# Altium PCB PCB1.PcbDoc (part 2 of 2)
Units mm, origin at the board's own origin, x right, y up, seen from the top; angles counter-clockwise.
Board outline 71.37 x 73.91 mm, 2 copper layers (Top Layer, Bottom Layer); 19 components, 50 nets, 188 pads, 78 vias.
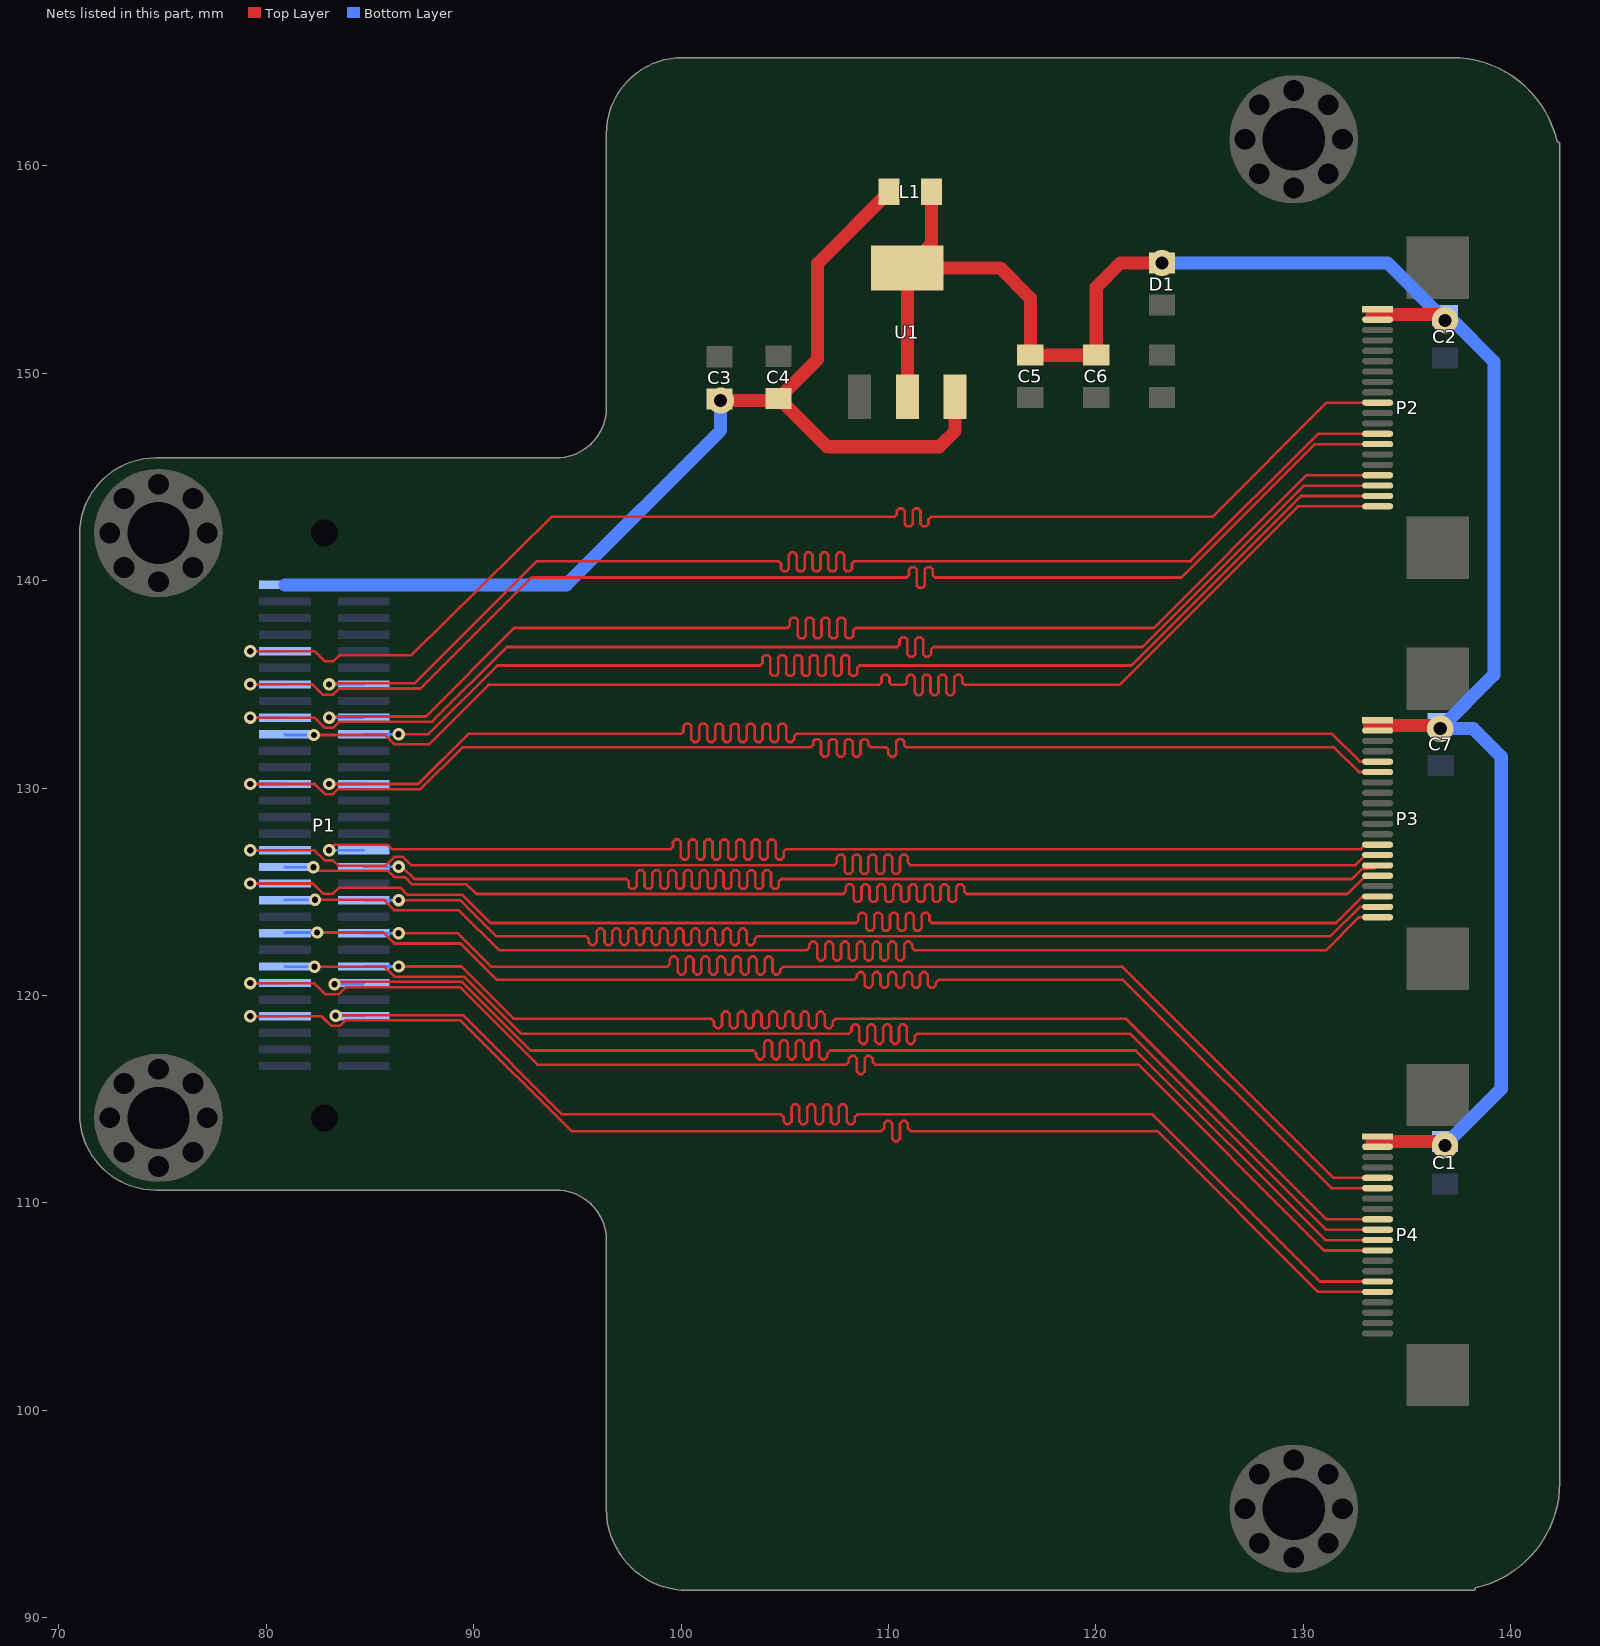
[diagram p2: the nets of this part, all layers, seen from the top]

## Via types
v1: diameter 0.6, hole 0.3, Top Layer to Bottom Layer, 70 vias
v2: diameter 1.27, hole 0.635, Top Layer to Bottom Layer, 8 vias

## Nets (pads, with @x,y where several pads share a name; then routed paths per layer and width w, separated by ;. In a path a pad name is that pad's centre, name@x,y a point inside that pad or via, vN(x,y) a via of type N, cw(c..) or ccw(c..) an arc to the next point about the centre after c; other vN are vias at no path point) (continued)
U14: P1.43 P4.5 | length 63.8
  Top Layer w0.127: v1(86.377,123) 89.242,123 90.856,121.387 95.987,121.387 99.32,121.387 99.454,121.52 99.454,121.753 99.587,121.887 99.701,121.887 99.835,121.753 99.835,121.387 99.835,121.139 99.968,121.006 100.082,121.006 100.216,121.139 100.216,121.387 100.216,121.753 100.349,121.887 100.463,121.887 100.597,121.753 100.597,121.387 100.597,121.139 100.73,121.006 100.844,121.006 100.978,121.139 100.978,121.387 100.978,121.753 101.111,121.887 101.225,121.887 101.359,121.753 101.359,121.387 101.359,121.139 101.492,121.006 101.606,121.006 101.74,121.139 101.74,121.387 101.74,121.753 101.873,121.887 101.987,121.887 102.121,121.753 102.121,121.387 102.121,121.139 102.254,121.006 102.368,121.006 102.502,121.139 102.502,121.387 102.502,121.753 102.635,121.887 102.749,121.887 102.883,121.753 102.883,121.387 102.883,121.139 103.016,121.006 103.13,121.006 103.264,121.139 103.264,121.387 103.264,121.753 103.397,121.887 103.511,121.887 103.645,121.753 103.645,121.387 103.645,121.139 103.778,121.006 103.892,121.006 104.026,121.139 104.026,121.387 104.026,121.753 104.159,121.887 104.273,121.887 104.407,121.753 104.407,121.387 104.407,121.139 104.54,121.006 104.654,121.006 104.788,121.139 104.788,121.253 104.921,121.387 104.978,121.387 121.285,121.387 131.463,111.208 P4.5@133.586,111.208
  Bottom Layer w0.127: P1.43@84.7,123 v1(86.377,123)
U15: P1.44 P4.6 | length 63.7
  Top Layer w0.127: v1(82.448,123.038) 85.646,123.038 86.174,122.509 89.374,122.509 91.132,120.752 108.28,120.752 108.337,120.752 108.471,120.885 108.471,120.999 108.604,121.133 108.718,121.133 108.852,120.999 108.852,120.752 108.852,120.504 108.985,120.371 109.099,120.371 109.233,120.504 109.233,120.752 109.233,120.999 109.366,121.133 109.48,121.133 109.614,120.999 109.614,120.752 109.614,120.504 109.747,120.371 109.861,120.371 109.995,120.504 109.995,120.752 109.995,120.999 110.128,121.133 110.242,121.133 110.376,120.999 110.376,120.752 110.376,120.504 110.509,120.371 110.623,120.371 110.757,120.504 110.757,120.752 110.757,120.999 110.89,121.133 111.004,121.133 111.138,120.999 111.138,120.752 111.138,120.504 111.271,120.371 111.385,120.371 111.519,120.504 111.519,120.752 111.519,120.999 111.652,121.133 111.766,121.133 111.9,120.999 111.9,120.752 111.9,120.504 112.033,120.371 112.147,120.371 112.281,120.504 112.281,120.618 112.414,120.752 115.646,120.752 121.31,120.752 131.354,110.708 P4.6@133.586,110.708
  Bottom Layer w0.127: P1.44@80.9,123 80.938,123.038 v1(82.448,123.038)
U17: P1.38 P3.18 | length 64.1
  Top Layer w0.127: v1(79.223,125.4) 82.253,125.4 82.743,124.909 83.226,124.909 83.518,125.201 86.469,125.201 86.817,124.854 89.449,124.854 90.809,123.495 108.356,123.495 108.433,123.495 108.547,123.609 108.547,123.871 108.661,123.986 108.814,123.986 108.928,123.871 108.928,123.495 108.928,123.237 109.042,123.123 109.195,123.123 109.309,123.237 109.309,123.495 109.309,123.871 109.423,123.986 109.576,123.986 109.69,123.871 109.69,123.495 109.69,123.237 109.804,123.123 109.957,123.123 110.071,123.237 110.071,123.495 110.071,123.871 110.185,123.986 110.338,123.986 110.452,123.871 110.452,123.495 110.452,123.237 110.566,123.123 110.719,123.123 110.833,123.237 110.833,123.495 110.833,123.871 110.947,123.986 111.1,123.986 111.214,123.871 111.214,123.495 111.214,123.237 111.328,123.123 111.481,123.123 111.595,123.237 111.595,123.495 111.595,123.871 111.709,123.986 111.862,123.986 111.976,123.871 111.976,123.609 112.09,123.495 117.627,123.495 131.584,123.495 132.863,124.774 P3.18@133.586,124.774
  Bottom Layer w0.127: v1(79.223,125.4) P1.38@80.9,125.4
U18: P1.33 P3.13 | length 64
  Top Layer w0.127: v1(83.023,127) 83.297,127.274 85.85,127.274 86.069,127.055 95.453,127.055 99.492,127.055 99.606,127.17 99.606,127.406 99.72,127.52 99.873,127.52 99.987,127.406 99.987,127.055 99.987,126.67 100.101,126.555 100.254,126.555 100.368,126.67 100.368,127.055 100.368,127.406 100.482,127.52 100.635,127.52 100.749,127.406 100.749,127.055 100.749,126.67 100.863,126.555 101.016,126.555 101.13,126.67 101.13,127.055 101.13,127.406 101.244,127.52 101.397,127.52 101.511,127.406 101.511,127.055 101.511,126.67 101.625,126.555 101.778,126.555 101.892,126.67 101.892,127.055 101.892,127.406 102.006,127.52 102.159,127.52 102.273,127.406 102.273,127.055 102.273,126.67 102.387,126.555 102.54,126.555 102.654,126.67 102.654,127.055 102.654,127.406 102.768,127.52 102.921,127.52 103.035,127.406 103.035,127.055 103.035,126.67 103.149,126.555 103.302,126.555 103.416,126.67 103.416,127.055 103.416,127.406 103.53,127.52 103.683,127.52 103.797,127.406 103.797,127.055 103.797,126.67 103.911,126.555 104.064,126.555 104.178,126.67 104.178,127.055 104.178,127.406 104.292,127.52 104.445,127.52 104.559,127.406 104.559,127.055 104.559,126.67 104.673,126.555 104.826,126.555 104.94,126.67 104.94,126.941 105.054,127.055 105.131,127.055 132.785,127.055 133.004,127.274 P3.13@133.586,127.274
  Bottom Layer w0.127: v1(83.023,127) P1.33@84.7,127
U19: P1.34 P3.14 | length 63.9
  Top Layer w0.127: v1(79.223,127) 82.329,127 82.82,126.509 83.226,126.509 83.472,126.263 85.747,126.263 86.174,126.69 86.58,126.69 86.982,126.289 107.315,126.289 107.391,126.289 107.505,126.403 107.505,126.674 107.62,126.789 107.772,126.789 107.886,126.674 107.886,126.289 107.886,125.984 108.001,125.87 108.153,125.87 108.267,125.984 108.267,126.289 108.267,126.674 108.382,126.789 108.534,126.789 108.648,126.674 108.648,126.289 108.648,125.984 108.763,125.87 108.915,125.87 109.029,125.984 109.029,126.289 109.029,126.674 109.144,126.789 109.296,126.789 109.41,126.674 109.41,126.289 109.41,125.984 109.525,125.87 109.677,125.87 109.791,125.984 109.791,126.289 109.791,126.674 109.906,126.789 110.058,126.789 110.172,126.674 110.172,126.289 110.172,125.984 110.287,125.87 110.439,125.87 110.553,125.984 110.553,126.289 110.553,126.674 110.668,126.789 110.82,126.789 110.934,126.674 110.934,126.403 111.049,126.289 115.545,126.289 132.519,126.289 133.004,126.774 P3.14@133.586,126.774
  Bottom Layer w0.127: v1(79.223,127) P1.34@80.9,127
U20: P1.10 P2.10 | length 64.1
  Top Layer w0.127: v1(79.223,136.6) 82.329,136.6 82.82,136.109 83.226,136.109 83.518,136.401 86.973,136.401 93.755,143.078 110.211,143.078 110.287,143.078 110.401,143.192 110.401,143.368 110.515,143.482 110.668,143.482 110.782,143.368 110.782,143.078 110.782,142.738 110.896,142.624 111.049,142.624 111.163,142.738 111.163,143.078 111.163,143.368 111.277,143.482 111.43,143.482 111.544,143.368 111.544,143.078 111.544,142.738 111.658,142.624 111.811,142.624 111.925,142.738 111.925,142.964 112.039,143.078 118.542,143.078 125.614,143.078 131.122,148.586 P2.10@133.586,148.586
  Bottom Layer w0.127: v1(79.223,136.6) P1.10@80.9,136.6
V12: P1.53 P4.15 | length 64.1
  Top Layer w0.127: v1(83.337,119.024) 83.368,119.055 89.471,119.055 94.252,114.275 101.219,114.275 104.807,114.275 104.94,114.141 104.94,113.922 105.073,113.788 105.188,113.788 105.321,113.922 105.321,114.275 105.321,114.627 105.454,114.761 105.569,114.761 105.702,114.627 105.702,114.275 105.702,113.922 105.835,113.788 105.95,113.788 106.083,113.922 106.083,114.275 106.083,114.627 106.216,114.761 106.331,114.761 106.464,114.627 106.464,114.275 106.464,113.922 106.597,113.788 106.712,113.788 106.845,113.922 106.845,114.275 106.845,114.627 106.978,114.761 107.093,114.761 107.226,114.627 107.226,114.275 107.226,113.922 107.359,113.788 107.474,113.788 107.607,113.922 107.607,114.275 107.607,114.627 107.74,114.761 107.855,114.761 107.988,114.627 107.988,114.275 107.988,113.922 108.121,113.788 108.236,113.788 108.369,113.922 108.369,114.141 108.502,114.275 108.56,114.275 122.733,114.275 130.799,106.208 P4.15@133.586,106.208
  Bottom Layer w0.127: v1(83.337,119.024) 84.676,119.024 P1.53@84.7,119
V15: P1.35 P3.15 | length 63.7
  Top Layer w0.127: v1(86.377,126.2) 86.548,126.2 87.132,125.616 95.936,125.616 97.358,125.616 97.472,125.502 97.472,125.26 97.587,125.146 97.739,125.146 97.853,125.26 97.853,125.616 97.853,125.921 97.968,126.035 98.12,126.035 98.234,125.921 98.234,125.616 98.234,125.26 98.349,125.146 98.501,125.146 98.615,125.26 98.615,125.616 98.615,125.921 98.73,126.035 98.882,126.035 98.996,125.921 98.996,125.616 98.996,125.26 99.111,125.146 99.263,125.146 99.377,125.26 99.377,125.616 99.377,125.921 99.492,126.035 99.644,126.035 99.758,125.921 99.758,125.616 99.758,125.26 99.873,125.146 100.025,125.146 100.139,125.26 100.139,125.616 100.139,125.921 100.254,126.035 100.406,126.035 100.52,125.921 100.52,125.616 100.52,125.26 100.635,125.146 100.787,125.146 100.901,125.26 100.901,125.616 100.901,125.921 101.016,126.035 101.168,126.035 101.282,125.921 101.282,125.616 101.282,125.26 101.397,125.146 101.549,125.146 101.663,125.26 101.663,125.616 101.663,125.921 101.778,126.035 101.93,126.035 102.044,125.921 102.044,125.616 102.044,125.26 102.159,125.146 102.311,125.146 102.425,125.26 102.425,125.616 102.425,125.921 102.54,126.035 102.692,126.035 102.806,125.921 102.806,125.616 102.806,125.26 102.921,125.146 103.073,125.146 103.188,125.26 103.188,125.616 103.188,125.921 103.302,126.035 103.454,126.035 103.569,125.921 103.569,125.616 103.569,125.26 103.683,125.146 103.835,125.146 103.95,125.26 103.95,125.616 103.95,125.921 104.064,126.035 104.216,126.035 104.331,125.921 104.331,125.616 104.331,125.26 104.445,125.146 104.597,125.146 104.712,125.26 104.712,125.502 104.826,125.616 104.902,125.616 132.346,125.616 132.845,126.115 133.426,126.115 P3.15@133.586,126.274
  Bottom Layer w0.127: P1.35@84.7,126.2 v1(86.377,126.2)
V16: P1.39 P3.19 | length 63.9
  Top Layer w0.127: v1(86.377,124.6) 89.344,124.6 91.084,122.86 93.218,122.86 95.409,122.86 95.542,122.726 95.542,122.561 95.675,122.428 95.79,122.428 95.923,122.561 95.923,122.86 95.923,123.107 96.056,123.241 96.171,123.241 96.304,123.107 96.304,122.86 96.304,122.561 96.437,122.428 96.552,122.428 96.685,122.561 96.685,122.86 96.685,123.107 96.818,123.241 96.933,123.241 97.066,123.107 97.066,122.86 97.066,122.561 97.199,122.428 97.314,122.428 97.447,122.561 97.447,122.86 97.447,123.107 97.58,123.241 97.695,123.241 97.828,123.107 97.828,122.86 97.828,122.561 97.961,122.428 98.076,122.428 98.209,122.561 98.209,122.86 98.209,123.107 98.342,123.241 98.457,123.241 98.59,123.107 98.59,122.86 98.59,122.561 98.723,122.428 98.838,122.428 98.971,122.561 98.971,122.86 98.971,123.107 99.104,123.241 99.219,123.241 99.352,123.107 99.352,122.86 99.352,122.561 99.485,122.428 99.6,122.428 99.733,122.561 99.733,122.86 99.733,123.107 99.866,123.241 99.981,123.241 100.114,123.107 100.114,122.86 100.114,122.561 100.247,122.428 100.362,122.428 100.495,122.561 100.495,122.86 100.495,123.107 100.628,123.241 100.743,123.241 100.876,123.107 100.876,122.86 100.876,122.561 101.009,122.428 101.124,122.428 101.257,122.561 101.257,122.86 101.257,123.107 101.39,123.241 101.505,123.241 101.638,123.107 101.638,122.86 101.638,122.561 101.771,122.428 101.886,122.428 102.019,122.561 102.019,122.86 102.019,123.107 102.152,123.241 102.267,123.241 102.4,123.107 102.4,122.86 102.4,122.561 102.533,122.428 102.648,122.428 102.781,122.561 102.781,122.86 102.781,123.107 102.914,123.241 103.029,123.241 103.162,123.107 103.162,122.86 103.162,122.561 103.295,122.428 103.41,122.428 103.543,122.561 103.543,122.726 103.676,122.86 103.734,122.86 131.308,122.86 132.722,124.274 P3.19@133.586,124.274
  Bottom Layer w0.127: P1.39@84.7,124.6 v1(86.377,124.6)
V17: P1.25 P3.5 | length 64.1
  Top Layer w0.127: v1(83.023,130.2) 87.325,130.2 89.738,132.613 97.561,132.613 100,132.613 100.114,132.728 100.114,132.995 100.228,133.109 100.381,133.109 100.495,132.995 100.495,132.613 100.495,132.341 100.609,132.227 100.762,132.227 100.876,132.341 100.876,132.613 100.876,132.995 100.99,133.109 101.143,133.109 101.257,132.995 101.257,132.613 101.257,132.341 101.371,132.227 101.524,132.227 101.638,132.341 101.638,132.613 101.638,132.995 101.752,133.109 101.905,133.109 102.019,132.995 102.019,132.613 102.019,132.341 102.133,132.227 102.286,132.227 102.4,132.341 102.4,132.613 102.4,132.995 102.514,133.109 102.667,133.109 102.781,132.995 102.781,132.613 102.781,132.341 102.895,132.227 103.048,132.227 103.162,132.341 103.162,132.613 103.162,132.995 103.276,133.109 103.429,133.109 103.543,132.995 103.543,132.613 103.543,132.341 103.657,132.227 103.81,132.227 103.924,132.341 103.924,132.613 103.924,132.995 104.038,133.109 104.191,133.109 104.305,132.995 104.305,132.613 104.305,132.341 104.419,132.227 104.572,132.227 104.686,132.341 104.686,132.613 104.686,132.995 104.8,133.109 104.953,133.109 105.067,132.995 105.067,132.613 105.067,132.341 105.181,132.227 105.334,132.227 105.448,132.341 105.448,132.499 105.562,132.613 105.639,132.613 131.394,132.613 132.733,131.274 P3.5@133.586,131.274
  Bottom Layer w0.127: v1(83.023,130.2) P1.25@84.7,130.2
V18: P1.26 P3.6 | length 63.7
  Top Layer w0.127: v1(79.223,130.2) 82.329,130.2 82.82,129.709 83.226,129.709 83.463,129.946 87.43,129.946 89.453,131.969 106.172,131.969 106.248,131.969 106.362,132.083 106.362,132.245 106.477,132.359 106.629,132.359 106.743,132.245 106.743,131.969 106.743,131.635 106.858,131.521 107.01,131.521 107.124,131.635 107.124,131.969 107.124,132.245 107.239,132.359 107.391,132.359 107.505,132.245 107.505,131.969 107.505,131.635 107.62,131.521 107.772,131.521 107.886,131.635 107.886,131.969 107.886,132.245 108.001,132.359 108.153,132.359 108.267,132.245 108.267,131.969 108.267,131.635 108.382,131.521 108.534,131.521 108.648,131.635 108.648,131.969 108.648,132.245 108.763,132.359 108.915,132.359 109.029,132.245 109.029,132.083 109.144,131.969 109.41,131.969 109.423,131.969 109.614,131.969 109.88,131.969 109.995,131.854 109.995,131.635 110.109,131.521 110.261,131.521 110.376,131.635 110.376,131.969 110.376,132.245 110.49,132.359 110.642,132.359 110.757,132.245 110.757,132.083 110.871,131.969 112.674,131.969 131.48,131.969 132.675,130.774 P3.6@133.586,130.774
  Bottom Layer w0.127: v1(79.223,130.2) P1.26@80.9,130.2
V20: P1.13 P2.13 | length 64.1
  Top Layer w0.127: v1(83.023,135) 83.079,135.055 87.151,135.055 93.04,140.945 100.813,140.945 104.699,140.945 104.813,140.83 104.813,140.571 104.927,140.457 105.08,140.457 105.194,140.571 105.194,140.945 105.194,141.25 105.308,141.364 105.461,141.364 105.575,141.25 105.575,140.945 105.575,140.571 105.689,140.457 105.842,140.457 105.956,140.571 105.956,140.945 105.956,141.25 106.07,141.364 106.223,141.364 106.337,141.25 106.337,140.945 106.337,140.571 106.451,140.457 106.604,140.457 106.718,140.571 106.718,140.945 106.718,141.25 106.832,141.364 106.985,141.364 107.099,141.25 107.099,140.945 107.099,140.571 107.213,140.457 107.366,140.457 107.48,140.571 107.48,140.945 107.48,141.25 107.594,141.364 107.747,141.364 107.861,141.25 107.861,140.945 107.861,140.571 107.975,140.457 108.128,140.457 108.242,140.571 108.242,140.83 108.356,140.945 108.433,140.945 124.558,140.945 130.699,147.086 P2.13@133.586,147.086
  Bottom Layer w0.127: v1(83.023,135) P1.13@84.7,135
VCC_3V3: C1.2 C2.2 C5.2 C6.2 C7.2 D1.1 L1.2 P2.1 P2.2 P3.1 P3.2 P4.1 P4.2 U1.2 U1.4 | length 100.5
  Top Layer w0.635: U1.2@110.908,148.881 U1.4@110.908,155.081 ; L1.2@112.065,158.75 112.065,156.237 U1.4@110.908,155.081 ; v2(123.19,155.321) 121.183,155.321 120.015,154.153 C6.2@120.015,150.876 C5.2@116.84,150.876 116.84,153.619 115.379,155.081 U1.4@110.908,155.081 ; 133.198,133.02 136.449,133.02 v2(136.601,132.867) ; 133.325,112.954 136.652,112.954 v2(136.83,112.776) ; 133.325,152.806 133.35,152.832 136.55,152.832 v2(136.83,152.552)
  Bottom Layer w0.635: v2(123.19,155.321) 134.061,155.321 v2(136.83,152.552) 137.211,152.552 139.192,150.571 139.192,135.458 v2(136.601,132.867) 138.201,132.867 139.548,131.521 139.548,115.494 v2(136.83,112.776)
VCC_5V: C3.2 C4.2 L1.1 P1.1 P1.2 U1.3 | length 52
  Top Layer w0.635: v2(101.905,148.692) 104.597,148.692 C4.2@104.699,148.793 ; L1.1@110.033,158.75 106.578,155.296 106.578,150.673 C4.2@104.699,148.793 ; U1.3@113.208,148.881 113.208,147.219 112.446,146.456 107.036,146.456 C4.2@104.699,148.793
  Bottom Layer w0.635: P1.2@80.9,139.8 P1.1@84.7,139.8 94.461,139.8 101.905,147.244 v2(101.905,148.692)
W13: P1.54 P4.16 | length 64.1
  Top Layer w0.127: v1(79.223,119) 82.668,119 83.134,118.534 83.541,118.534 83.808,118.801 89.366,118.801 94.706,113.462 109.601,113.462 109.658,113.462 109.791,113.595 109.791,113.828 109.925,113.962 110.039,113.962 110.172,113.828 110.172,113.462 110.172,113.095 110.306,112.962 110.42,112.962 110.553,113.095 110.553,113.462 110.553,113.828 110.687,113.962 110.801,113.962 110.934,113.828 110.934,113.595 111.068,113.462 120.04,113.462 122.961,113.462 130.715,105.708 P4.16@133.586,105.708
  Bottom Layer w0.127: v1(79.223,119) P1.54@80.9,119
W14: P1.49 P4.11 | length 63.7
  Top Layer w0.127: v1(83.287,120.548) 83.394,120.655 89.432,120.655 92.739,117.348 96.647,117.348 103.486,117.348 103.619,117.215 103.619,117.05 103.753,116.916 103.867,116.916 104,117.05 104,117.348 104,117.715 104.134,117.848 104.248,117.848 104.381,117.715 104.381,117.348 104.381,117.05 104.515,116.916 104.629,116.916 104.762,117.05 104.762,117.348 104.762,117.715 104.896,117.848 105.01,117.848 105.143,117.715 105.143,117.348 105.143,117.05 105.277,116.916 105.391,116.916 105.524,117.05 105.524,117.348 105.524,117.715 105.658,117.848 105.772,117.848 105.905,117.715 105.905,117.348 105.905,117.05 106.039,116.916 106.153,116.916 106.286,117.05 106.286,117.348 106.286,117.715 106.42,117.848 106.534,117.848 106.667,117.715 106.667,117.348 106.667,117.05 106.801,116.916 106.915,116.916 107.048,117.05 107.048,117.215 107.182,117.348 107.239,117.348 121.92,117.348 131.06,108.208 P4.11@133.586,108.208
  Bottom Layer w0.127: v1(83.287,120.548) 84.648,120.548 P1.49@84.7,120.6
W15: P1.36 P3.16 | length 64.1
  Top Layer w0.127: v1(82.271,126.187) 82.448,126.009 85.874,126.009 86.174,125.709 86.68,125.709 87.027,125.362 89.66,125.362 90.13,124.892 107.747,124.892 107.823,124.892 107.937,125.006 107.937,125.242 108.052,125.357 108.204,125.357 108.318,125.242 108.318,124.892 108.318,124.631 108.433,124.516 108.585,124.516 108.699,124.631 108.699,124.892 108.699,125.242 108.814,125.357 108.966,125.357 109.08,125.242 109.08,124.892 109.08,124.631 109.195,124.516 109.347,124.516 109.461,124.631 109.461,124.892 109.461,125.242 109.576,125.357 109.728,125.357 109.842,125.242 109.842,124.892 109.842,124.631 109.957,124.516 110.109,124.516 110.223,124.631 110.223,124.892 110.223,125.242 110.338,125.357 110.49,125.357 110.604,125.242 110.604,124.892 110.604,124.631 110.719,124.516 110.871,124.516 110.985,124.631 110.985,124.892 110.985,125.242 111.1,125.357 111.252,125.357 111.366,125.242 111.366,124.892 111.366,124.631 111.481,124.516 111.633,124.516 111.747,124.631 111.747,124.892 111.747,125.242 111.862,125.357 112.014,125.357 112.128,125.242 112.128,124.892 112.128,124.631 112.243,124.516 112.395,124.516 112.509,124.631 112.509,124.892 112.509,125.242 112.624,125.357 112.776,125.357 112.89,125.242 112.89,124.892 112.89,124.631 113.005,124.516 113.157,124.516 113.271,124.631 113.271,124.892 113.271,125.242 113.386,125.357 113.538,125.357 113.652,125.242 113.652,125.006 113.767,124.892 119.583,124.892 132.122,124.892 133.004,125.774 P3.16@133.586,125.774
  Bottom Layer w0.127: P1.36@80.9,126.2 80.913,126.187 v1(82.271,126.187)
W16: P1.40 P3.20 | length 64.1
  Top Layer w0.127: v1(82.347,124.612) 85.671,124.612 86.174,124.109 89.301,124.109 91.237,122.174 105.994,122.174 106.051,122.174 106.185,122.307 106.185,122.47 106.318,122.603 106.432,122.603 106.566,122.47 106.566,122.174 106.566,121.81 106.699,121.677 106.813,121.677 106.947,121.81 106.947,122.174 106.947,122.47 107.08,122.603 107.194,122.603 107.328,122.47 107.328,122.174 107.328,121.81 107.461,121.677 107.575,121.677 107.709,121.81 107.709,122.174 107.709,122.47 107.842,122.603 107.956,122.603 108.09,122.47 108.09,122.174 108.09,121.81 108.223,121.677 108.337,121.677 108.471,121.81 108.471,122.174 108.471,122.47 108.604,122.603 108.718,122.603 108.852,122.47 108.852,122.174 108.852,121.81 108.985,121.677 109.099,121.677 109.233,121.81 109.233,122.174 109.233,122.47 109.366,122.603 109.48,122.603 109.614,122.47 109.614,122.174 109.614,121.81 109.747,121.677 109.861,121.677 109.995,121.81 109.995,122.174 109.995,122.47 110.128,122.603 110.242,122.603 110.376,122.47 110.376,122.174 110.376,121.81 110.509,121.677 110.623,121.677 110.757,121.81 110.757,122.174 110.757,122.47 110.89,122.603 111.004,122.603 111.138,122.47 111.138,122.307 111.271,122.174 112.268,122.174 131.089,122.174 132.69,123.774 P3.20@133.586,123.774
  Bottom Layer w0.127: P1.40@80.9,124.6 80.912,124.612 v1(82.347,124.612)
W18: P1.17 P2.17 | length 63.9
  Top Layer w0.127: v1(83.023,133.4) 83.079,133.455 87.688,133.455 91.952,137.719 100.813,137.719 105.131,137.719 105.245,137.833 105.245,138.104 105.359,138.219 105.512,138.219 105.626,138.104 105.626,137.719 105.626,137.333 105.74,137.219 105.893,137.219 106.007,137.333 106.007,137.719 106.007,138.104 106.121,138.219 106.274,138.219 106.388,138.104 106.388,137.719 106.388,137.333 106.502,137.219 106.655,137.219 106.769,137.333 106.769,137.719 106.769,138.104 106.883,138.219 107.036,138.219 107.15,138.104 107.15,137.719 107.15,137.333 107.264,137.219 107.417,137.219 107.531,137.333 107.531,137.719 107.531,138.104 107.645,138.219 107.798,138.219 107.912,138.104 107.912,137.719 107.912,137.333 108.026,137.219 108.179,137.219 108.293,137.333 108.293,137.605 108.407,137.719 108.483,137.719 122.798,137.719 130.166,145.086 P2.17@133.586,145.086
  Bottom Layer w0.127: v1(83.023,133.4) P1.17@84.7,133.4
W19: P1.18 P2.18 | length 64.1
  Top Layer w0.127: v1(79.223,133.4) 82.329,133.4 82.82,132.909 83.226,132.909 83.514,133.198 86.538,133.198 86.542,133.201 87.989,133.201 91.592,136.804 110.338,136.804 110.414,136.804 110.528,136.919 110.528,137.157 110.642,137.271 110.795,137.271 110.909,137.157 110.909,136.804 110.909,136.452 111.023,136.338 111.176,136.338 111.29,136.452 111.29,136.804 111.29,137.157 111.404,137.271 111.557,137.271 111.671,137.157 111.671,136.804 111.671,136.452 111.785,136.338 111.938,136.338 112.052,136.452 112.052,136.69 112.166,136.804 115.316,136.804 122.243,136.804 130.025,144.586 P2.18@133.586,144.586
  Bottom Layer w0.127: v1(79.223,133.4) P1.18@80.9,133.4
W20: P1.14 P2.14 | length 63.7
  Top Layer w0.127: v1(79.223,135) 82.229,135 82.719,134.509 83.226,134.509 83.518,134.801 87.43,134.801 92.786,140.157 110.795,140.157 110.871,140.157 110.985,140.272 110.985,140.543 111.1,140.657 111.252,140.657 111.366,140.543 111.366,140.157 111.366,139.772 111.481,139.657 111.633,139.657 111.747,139.772 111.747,140.157 111.747,140.543 111.862,140.657 112.014,140.657 112.128,140.543 112.128,140.272 112.243,140.157 117.094,140.157 124.13,140.157 130.559,146.586 P2.14@133.586,146.586
  Bottom Layer w0.127: v1(79.223,135) P1.14@80.9,135
Y14: P1.50 P4.12 | length 63.7
  Top Layer w0.127: v1(79.223,120.6) 82.303,120.6 82.845,120.058 83.49,120.058 83.833,120.401 89.326,120.401 93.066,116.662 107.899,116.662 107.956,116.662 108.09,116.796 108.09,116.961 108.223,117.094 108.337,117.094 108.471,116.961 108.471,116.662 108.471,116.338 108.604,116.205 108.718,116.205 108.852,116.338 108.852,116.662 108.852,116.961 108.985,117.094 109.099,117.094 109.233,116.961 109.233,116.796 109.366,116.662 115.367,116.662 122.047,116.662 131.001,107.708 P4.12@133.586,107.708
  Bottom Layer w0.127: v1(79.223,120.6) P1.50@80.9,120.6
Y16: P1.47 P4.9 | length 63.7
  Top Layer w0.127: v1(86.377,121.4) 89.406,121.4 91.934,118.872 96.977,118.872 101.454,118.872 101.587,118.739 101.587,118.548 101.721,118.415 101.835,118.415 101.968,118.548 101.968,118.872 101.968,119.094 102.102,119.228 102.216,119.228 102.349,119.094 102.349,118.872 102.349,118.548 102.483,118.415 102.597,118.415 102.73,118.548 102.73,118.872 102.73,119.094 102.864,119.228 102.978,119.228 103.111,119.094 103.111,118.872 103.111,118.548 103.245,118.415 103.359,118.415 103.492,118.548 103.492,118.872 103.492,119.094 103.626,119.228 103.74,119.228 103.873,119.094 103.873,118.872 103.873,118.548 104.007,118.415 104.121,118.415 104.254,118.548 104.254,118.872 104.254,119.094 104.388,119.228 104.502,119.228 104.635,119.094 104.635,118.872 104.635,118.548 104.769,118.415 104.883,118.415 105.016,118.548 105.016,118.872 105.016,119.094 105.15,119.228 105.264,119.228 105.397,119.094 105.397,118.872 105.397,118.548 105.531,118.415 105.645,118.415 105.778,118.548 105.778,118.872 105.778,119.094 105.912,119.228 106.026,119.228 106.159,119.094 106.159,118.872 106.159,118.548 106.293,118.415 106.407,118.415 106.54,118.548 106.54,118.872 106.54,119.094 106.674,119.228 106.788,119.228 106.921,119.094 106.921,118.872 106.921,118.548 107.055,118.415 107.169,118.415 107.302,118.548 107.302,118.739 107.436,118.872 107.493,118.872 121.463,118.872 131.127,109.208 P4.9@133.586,109.208
  Bottom Layer w0.127: P1.47@84.7,121.4 v1(86.377,121.4)
Y17: P1.48 P4.10 | length 64.1
  Top Layer w0.127: v1(82.321,121.387) 85.697,121.387 86.174,120.909 89.537,120.909 92.286,118.161 108.026,118.161 108.083,118.161 108.217,118.294 108.217,118.481 108.35,118.614 108.464,118.614 108.598,118.481 108.598,118.161 108.598,117.798 108.731,117.665 108.845,117.665 108.979,117.798 108.979,118.161 108.979,118.481 109.112,118.614 109.226,118.614 109.36,118.481 109.36,118.161 109.36,117.798 109.493,117.665 109.607,117.665 109.741,117.798 109.741,118.161 109.741,118.481 109.874,118.614 109.988,118.614 110.122,118.481 110.122,118.161 110.122,117.798 110.255,117.665 110.369,117.665 110.503,117.798 110.503,118.161 110.503,118.481 110.636,118.614 110.75,118.614 110.884,118.481 110.884,118.161 110.884,117.798 111.017,117.665 111.131,117.665 111.265,117.798 111.265,118.027 111.398,118.161 117.881,118.161 121.641,118.161 131.093,108.708 P4.10@133.586,108.708
  Bottom Layer w0.127: P1.48@80.9,121.4 80.912,121.412 80.937,121.387 v1(82.321,121.387)
Y18: P1.19 P2.19 | length 63.9
  Top Layer w0.127: v1(86.377,132.6) 87.82,132.6 91.135,135.915 101.676,135.915 103.81,135.915 103.924,136.03 103.924,136.301 104.038,136.415 104.191,136.415 104.305,136.301 104.305,135.915 104.305,135.53 104.419,135.415 104.572,135.415 104.686,135.53 104.686,135.915 104.686,136.301 104.8,136.415 104.953,136.415 105.067,136.301 105.067,135.915 105.067,135.53 105.181,135.415 105.334,135.415 105.448,135.53 105.448,135.915 105.448,136.301 105.562,136.415 105.715,136.415 105.829,136.301 105.829,135.915 105.829,135.53 105.943,135.415 106.096,135.415 106.21,135.53 106.21,135.915 106.21,136.301 106.324,136.415 106.477,136.415 106.591,136.301 106.591,135.915 106.591,135.53 106.705,135.415 106.858,135.415 106.972,135.53 106.972,135.915 106.972,136.301 107.086,136.415 107.239,136.415 107.353,136.301 107.353,135.915 107.353,135.53 107.467,135.415 107.62,135.415 107.734,135.53 107.734,135.915 107.734,136.301 107.848,136.415 108.001,136.415 108.115,136.301 108.115,135.915 108.115,135.53 108.229,135.415 108.382,135.415 108.496,135.53 108.496,135.801 108.61,135.915 108.687,135.915 121.713,135.915 129.884,144.086 P2.19@133.586,144.086
  Bottom Layer w0.127: P1.19@84.7,132.6 v1(86.377,132.6)
Y19: P1.20 P2.20 | length 64.1
  Top Layer w0.127: v1(82.296,132.563) 85.721,132.563 86.174,132.109 87.837,132.109 90.703,134.976 109.474,134.976 109.55,134.976 109.664,135.09 109.664,135.351 109.779,135.466 109.931,135.466 110.045,135.351 110.045,135.09 110.16,134.976 110.312,134.976 110.503,134.976 110.769,134.976 110.884,135.09 110.884,135.351 110.998,135.466 111.15,135.466 111.265,135.351 111.265,134.976 111.265,134.6 111.379,134.486 111.531,134.486 111.646,134.6 111.646,134.976 111.646,135.351 111.76,135.466 111.912,135.466 112.027,135.351 112.027,134.976 112.027,134.6 112.141,134.486 112.293,134.486 112.408,134.6 112.408,134.976 112.408,135.351 112.522,135.466 112.674,135.466 112.789,135.351 112.789,134.976 112.789,134.6 112.903,134.486 113.055,134.486 113.17,134.6 113.17,134.976 113.17,135.351 113.284,135.466 113.436,135.466 113.551,135.351 113.551,135.09 113.665,134.976 116.561,134.976 121.133,134.976 129.743,143.586 P2.20@133.586,143.586
  Bottom Layer w0.127: P1.20@80.9,132.6 80.937,132.563 v1(82.296,132.563)
pads on no net: Designator1.1 Designator2.1 Designator3.1 Designator4.1 P1.21 P1.22 P1.61 P1.62 P2.3 P2.6 P2.21 P2.22 P3.21 P3.22 P4.21 P4.22

## Polygon pours and split planes (outlines as drawn)
DGND on Top Layer "Bottom Layer-No Net" (solid, remove dead copper, pour order 4): 69.088,168.656 67.564,167.132 67.564,83.312 156.972,83.312 158.496,84.836 152.4,90.932 152.4,167.132
DGND on Bottom Layer "Bottom Layer-No Net" (solid, remove dead copper, pour order 6): 67.564,172.212 67.564,83.82 67.056,83.312 68.072,84.328 156.972,84.328 156.972,164.084 150.876,170.18

## Keep-outs
Keep-Out Layer:
  lines w0.254: 93.472,110.744 cw(c93.726,107.95) 96.52,108.204 ; 93.472,145.796 ccw(c93.726,148.59) 96.52,148.336 ; 93.98,110.744 74.676,110.744 cw(c74.676,114.3) 71.12,114.3 71.12,142.24 cw(c75.438,141.478) 76.2,145.796 93.98,145.796 ; 96.52,108.712 96.52,94.996 ccw(c100.33,95.25) 100.584,91.44 ; 96.52,147.828 96.52,162.052 cw(c100.076,161.544) 100.584,165.1 ; 100.076,91.44 138.176,91.44 ; 100.076,165.1 137.668,165.1 cw(c137.414,160.274) 142.24,160.02 ; 137.16,91.44 ccw(c137.16,96.52) 142.24,96.52 ; 142.24,96.012 142.24,161.036 ; 71.12,142.748 cw(c74.676,142.24) 75.184,145.796 ccw(c74.676,142.24) 71.12,142.748

## Other copper
Top Layer:
  rectangle net DGND: 135.788,109.601 138.024,111.76
  rectangle net DGND: 135.509,129.921 137.77,132.004
  rectangle net DGND: 135.89,149.758 138.049,151.663
  rectangle net DGND: 100.584,149.86 104.14,151.892
  rectangle net DGND: 115.316,147.828 124.968,149.86
  rectangle net DGND: 107.696,147.32 109.728,150.368

## Silkscreen, mask and mechanical layers (free items; w line width, h text height)
Top Overlay:
  drawing of 2273 lines, arcs and shapes, not listed
  text "JLCJLCJLCJLC" at 135.687,153.035 h0.8 r90
  text "1" at 130.937,152.984 h1.02 r270
  text "1" at 130.886,133.172 h1.02 r270
  text "1" at 130.861,113.106 h1.02 r270
  text "Designed by LiuYang" at 104.775,102.657 h1.02
  text "github.com/liuyang9609" at 104.673,99.736 h1.02
Bottom Overlay:
  text "2" at 78.156,140.157 h1.02 r90
  text "1" at 88.646,139.903 h1.02 r90
  text "59" at 89.052,117.754 h1.02 r90
  text "BTB Convert to FPC20" at 122.377,94.92 h1.02
Mechanical 1:
  lines w0.254: 137.16,91.44 ccw(c137.16,96.52) 142.24,96.52 142.24,161.036 ; 138.176,91.44 101.6,91.44 100.33,91.44 cw(c100.33,95.25) 96.52,95.25 96.52,106.68 96.52,108.204 ccw(c93.98,108.204) 93.98,110.744 74.676,110.744 cw(c74.676,114.3) 71.12,114.3 71.12,142.24 cw(c74.676,142.24) 74.676,145.796 93.98,145.796 ccw(c93.98,148.336) 96.52,148.336 96.52,161.544 cw(c100.076,161.544) 100.076,165.1 101.6,165.1 137.16,165.1 cw(c137.16,160.02) 142.24,160.02